# Altium PCB ConBoard20151008.PcbDoc
Units mil, origin at the board's own origin, x right, y up, seen from the top; angles counter-clockwise.
Board outline 6000 x 4000 mil, 2 copper layers (Top Layer, Bottom Layer); 12 components, 31 nets, 61 pads, 27 vias.
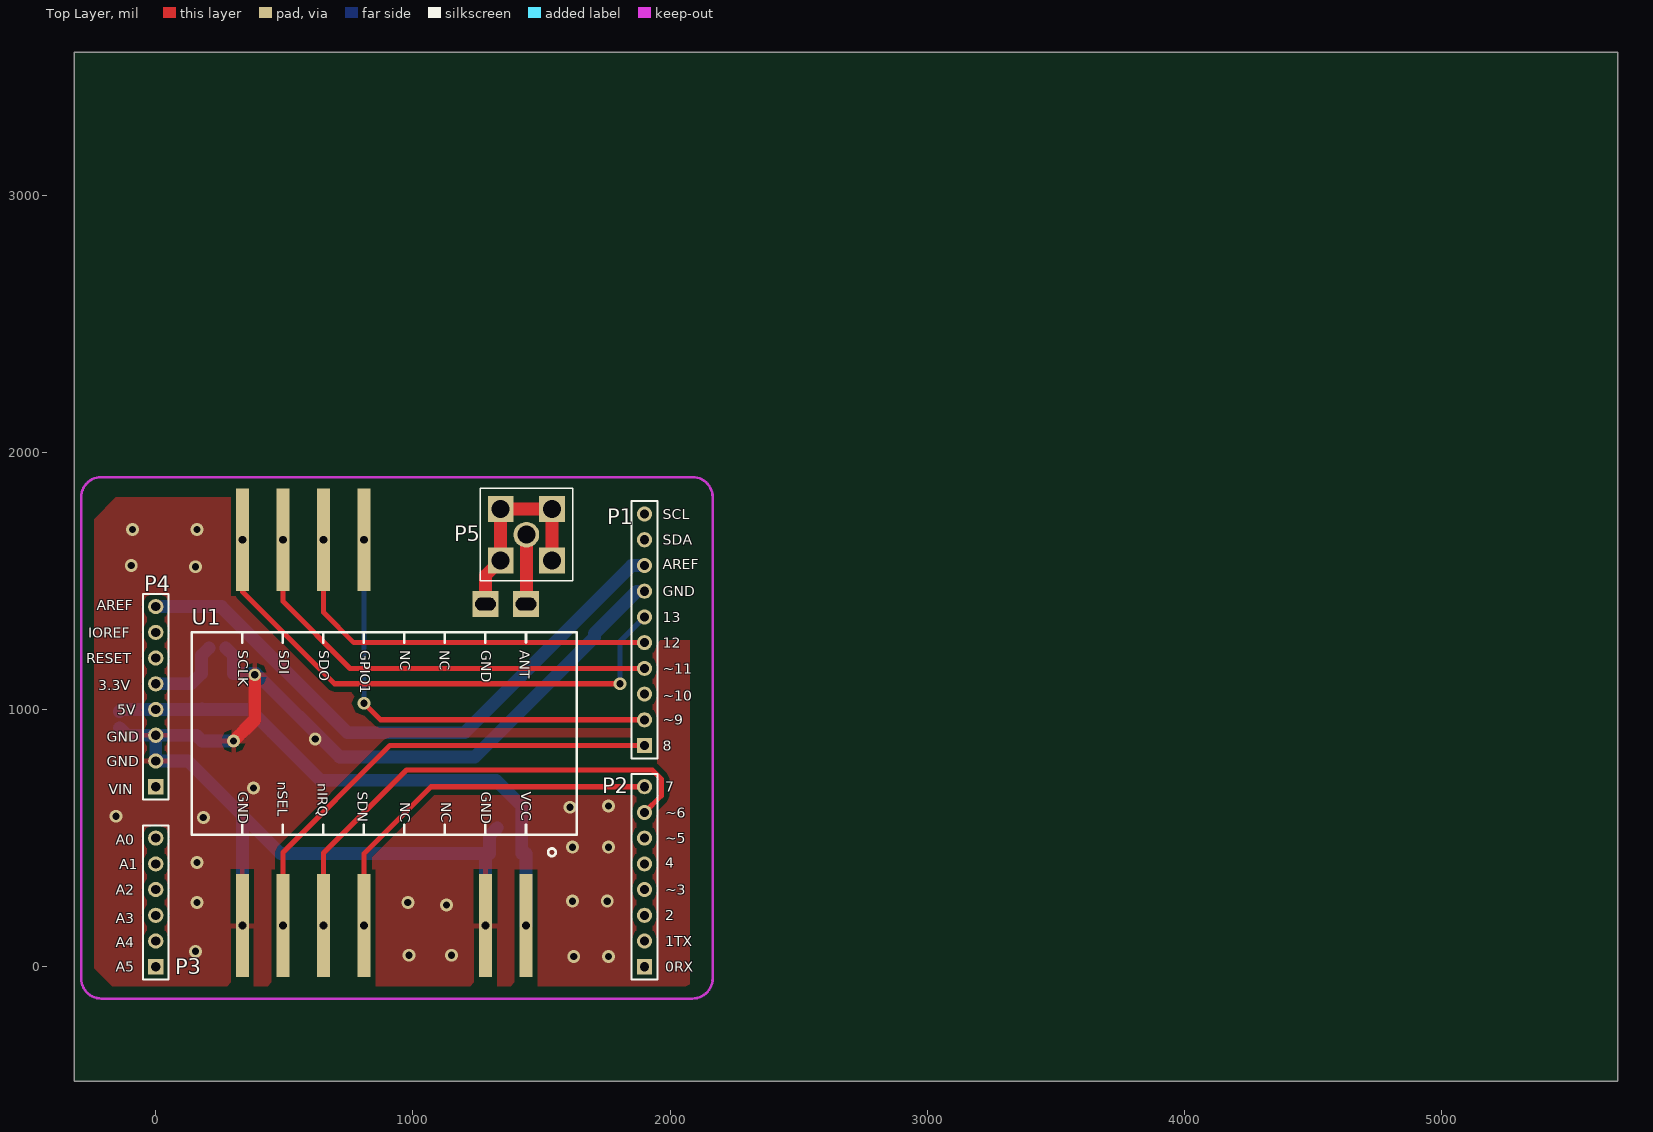
[diagram p0: Top Layer view]
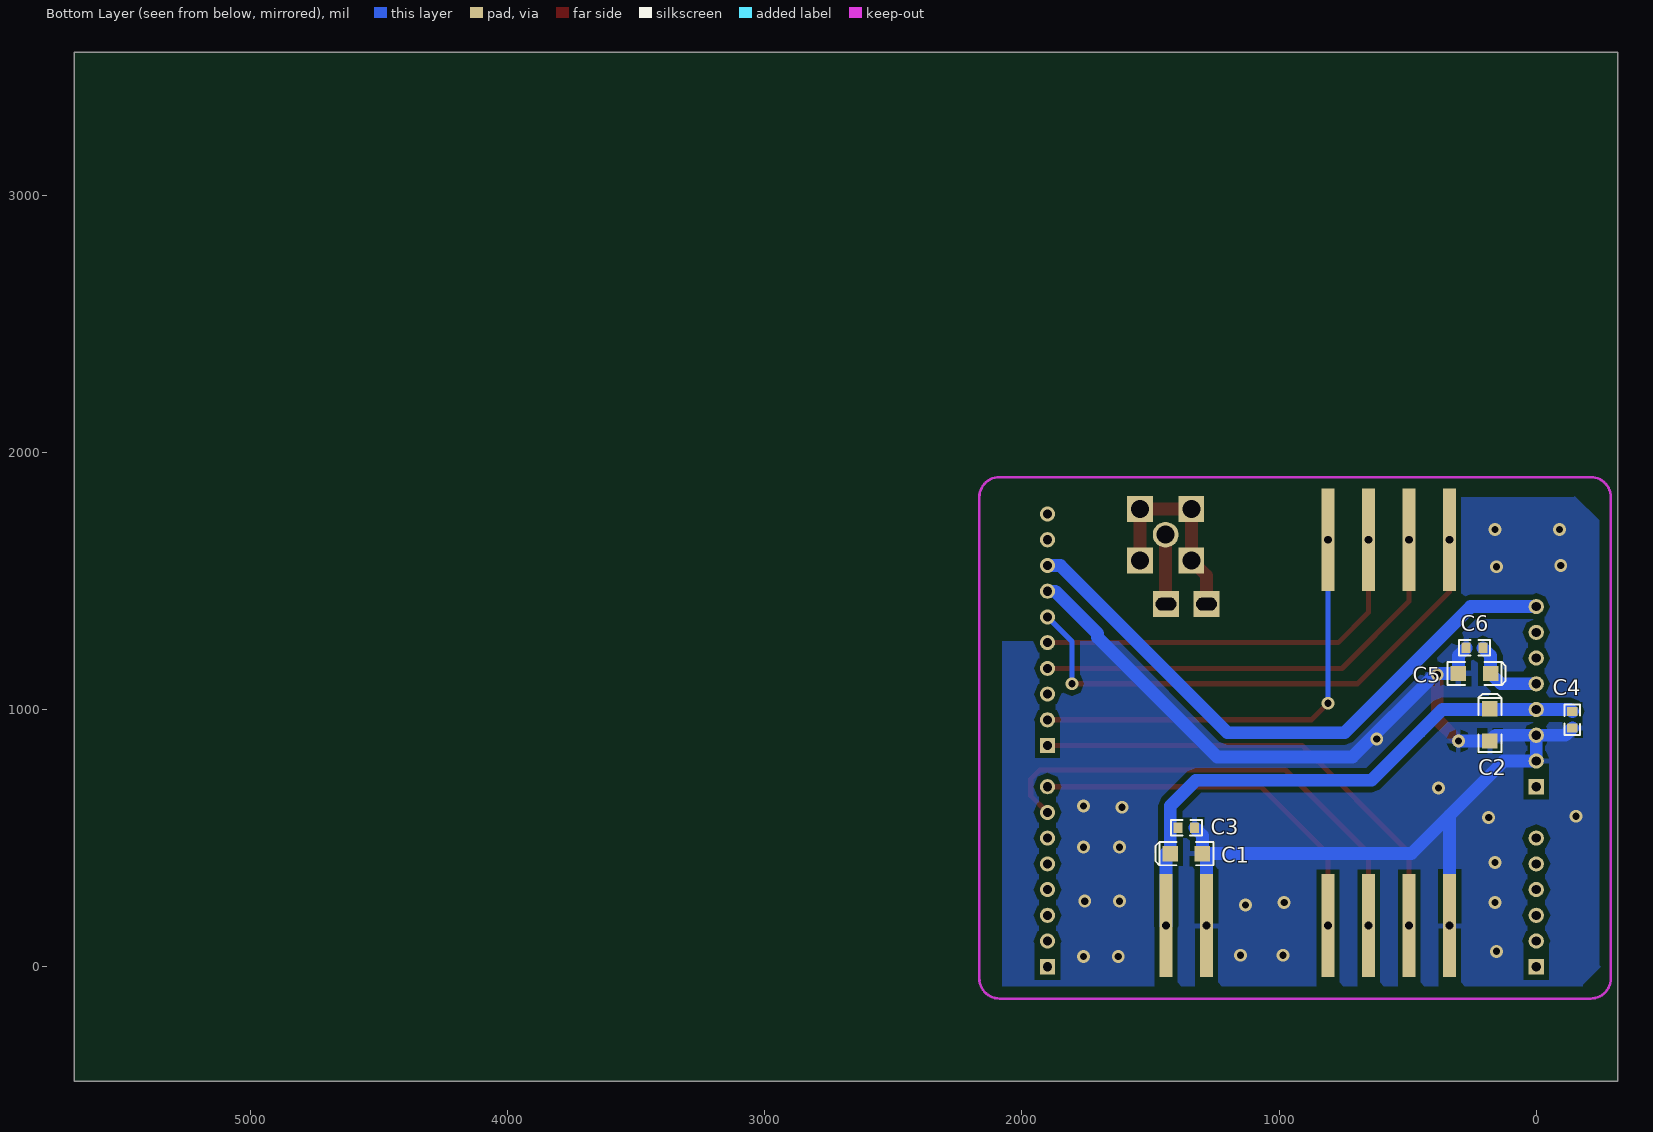
[diagram p1: Bottom Layer view, seen from below]

## Layer stack, top to bottom
Top Layer: signal copper 1.4
Dielectric: dielectric 12.6, FR-4, Dk 4.8
Bottom Layer: signal copper 1.4

## Board outline
-316.67,-445 5683.33,-445 5683.33,3555 -316.67,3555

## Design rules (kind name [scope] priority, off if disabled: settings)
Clearance [All] p1: gap=20
PolygonConnect [All] p1: connectstyle=Relief reliefconductorwidth=20 reliefentries=4 polygonreliefangle="90 Angle"
RoomDefinition Sheet1 [InComponentClass('Sheet1')] p1 off: confinementstyle=ConfineIn formatcopy=TRUE lockcomponents=FALSE outline 5728.33,-485 7543.33,-485 7543.33,635 5728.33,635
RoutingVias [All] p1: holewidth=28 width=50 viastyle="Through Hole" minholewidth=28 minwidth=50 maxholewidth=28 maxwidth=50
SilkToSilkClearance [All] p1 off: silktosilkclearance=10
SilkscreenOverComponentPads [All] p1 off: minsilkscreentomaskgap=10
SolderMaskExpansion [All] p1: expansion=4
Width [All] p1: maxlimit=100 minlimit=10 preferedwidth=10
26 further rules are at their usual default settings.

## Components (designator, comment, footprint, x,y, rotation, side; value= is the part's Value field where it differs from the comment)
C1 "47u" 3216C 1360,440 r180 bottom
C2 "47u" 3216C 180,940 r270 bottom
C3 "0.1uF" 0603 1360,540 r180 bottom
C4 "0.1uF" 0603 -140,960 r270 bottom
C5 "47u" 3216C 240,1140 r0 bottom
C6 "0.1uF" 0603 240,1240 r0 bottom
P1 "Header 10" HDR1X10 1900,860 r90 top
P2 "Header 8" HDR1X8 1900,0 r90 top
P3 "Header 6" HDR1X6 0,0 r90 top
P4 "Header 8" HDR1X8 0,700 r90 top
P5 "SMA_SMD" SMA 1440,1680 r0 top
U1 "Header 10" RF4463F30 140,1300 r270 top

## Footprints (in the part's own frame and the unit in brackets; to place one, negate y for a bottom-side part, rotate by r counter-clockwise, add the part's x,y. Pads: shape width x height; smd on the part's side, far side on the other; paste and mask are expansions set on the pad)
0603 [mil]
  rect 35x40 smd: 1(-32.66,0.32) 2(32.34,0.32)
  silkscreen extent -60,-30 60,30
3216C [mil]
  rect 60x60 smd: 1(-62.62,0) 2(62.38,0)
  silkscreen extent -120,-45 105,45
HDR1X6 [mm] "Connector; Header; 6 Position"
  rect 1.5x1.5 hole 0.9: 1(0,0)
  round 1.5 hole 0.9: 2(2.54,0) 3(5.08,0) 4(7.62,0) 5(10.16,0) 6(12.7,0)
  silkscreen extent -1.27,-1.27 13.97,1.27
HDR1X8 [mm] "Connector; Header; 8 Position"
  rect 1.5x1.5 hole 0.9: 1(0,0)
  round 1.5 hole 0.9: 2(2.54,0) 3(5.08,0) 4(7.62,0) 5(10.16,0) 6(12.7,0) 7(15.24,0) 8(17.78,0)
  silkscreen extent -1.27,-1.27 19.05,1.27
HDR1X10 [mm] "Connector; Header; 10 Position"
  rect 1.5x1.5 hole 0.9: 1(0,0)
  round 1.5 hole 0.9: 2(2.54,0) 3(5.08,0) 4(7.62,0) 5(10.16,0) 6(12.7,0) 7(15.24,0) 8(17.78,0) 9(20.32,0) 10(22.86,0)
  silkscreen extent -1.27,-1.27 24.13,1.27
RF4463F30 [mil]
  rect 400x50 hole 30: 1(1140,1299.21) 2(1140,1141.73) 5(1140,669.29) 6(1140,511.81) 7(1140,354.33) 8(1140,196.85) 9(-360,196.85) 10(-360,354.33) 11(-360,511.81) 12(-360,669.29)
  rect 100x100 hole 50 slot 80 at 90 deg: 15(-110,1141.73) 16(-110,1299.21)
  silkscreen extent 0,0 870,1496
SMA [mil]
  round 100 hole 70: 1(0.73,-0.32)
  rect 100x100 hole 70: 2(100.73,99.68) 3(-99.27,99.68) 4(-99.27,-100.32) 5(100.73,-100.32)
  silkscreen extent -179,-180 181,180

## Part data
C1 C2 C5: library part "CAPACITOR POL", "Capacitor"
C3 C4 C6: library part CAP, "Capacitor"
P1: "Header, 10-Pin"
P2 P4: "Header, 8-Pin"
P3: "Header, 6-Pin"
U1: library part RF4463F30, "Header, 10-Pin"

## Via types
v1: diameter 50, hole 28, Top Layer to Bottom Layer, 27 vias

## Nets (pads, with @x,y where several pads share a name; then routed paths per layer and width w, separated by ;. In a path a pad name is that pad's centre, name@x,y a point inside that pad or via, vN(x,y) a via of type N, cw(c..) or ccw(c..) an arc to the next point about the centre after c; other vN are vias at no path point)
0RX: P2.1
1TX: P2.2
2: P2.3
3.3V: C5.1 C6.1 P4.5 | length 306
  Bottom Layer w50: P4.5 137.38,1100 C5.1 177.38,1209.72 C6.1
4: P2.5
5V: C1.1 C2.1 C3.1 C4.1 P4.4 U1.1 | length 2190
  Bottom Layer w50: C4.1 -132.98,1000 P4.4 C2.1@177.38,1000 ; C2.1 C2.1@177.38,1000 ; C1.1 1422.62,540 1422.62,540.32 1422.62,625 1322.62,725 640,725 452.5,912.5 365,1000 C2.1@177.38,1000 ; U1.1 C1.1@1439.21,440
7: P2.8 U1.5 | length 1478
  Top Layer w20: U1.5 809.29,439.29 1070,700 P2.8
8: P1.1 U1.7 | length 1862.2
  Top Layer w20: U1.7 494.33,444.33 910,860 P1.1
12: P1.5 U1.11 | length 1579
  Top Layer w20: U1.11 651.81,1378.19 770,1260 P1.5
13: P1.6 U1.9 | length 2117.7
  Top Layer w20: U1.9 336.85,1458.15 695,1100 v1(1805,1100)
  Bottom Layer w20: v1(1805,1100) 1805,1265 P1.6
A0: P3.6
A1: P3.5
A2: P3.4
A3: P3.3
A4: P3.2
A5: P3.1
AGND: P5.2 P5.3 P5.4 P5.5 U1.15 | length 794.1
  Top Layer w50: U1.15 1281.73,1520.68 P5.4 P5.3 P5.2 P5.5
ANT: P5.1 U1.16 | length 270.3
  Top Layer w50: U1.16 1440.73,1411.52 P5.1
AREF: P1.8 P4.8 | length 2372.2
  Bottom Layer w50: P4.8 255,1400 745,910 1200,910 1850,1560 P1.8
GND: C1.2 C2.2 C3.2 C4.2 C5.2 C6.2 P1.7 P4.2 P4.3 U1.2 U1.8 | length 5249.7
  Top Layer w50: v1(302.62,877.61) 385,960 v1(385,1135)
  Bottom Layer w50: C4.2 -112.66,900 P4.3 ; C6.2 302.38,1209.64 C5.2 390,1140 715,815 1240,815 1705,1280 1705,1295 1870,1460 P1.7 ; v1(302.62,877.61) C2.2 157.62,900 P4.3 ; U1.8 336.85,588.15 ; U1.2 1281.73,424.12 C1.2 ; C3.2 1297.62,510.28 C1.2 ; P4.3 P4.2 125,800 336.85,588.15 ; 336.85,588.15 485,440 C1.2
  other v1: 1625,40 1760,40 985,45 1150,45 155,60 1130,240 160,250 980,250 1620,255 1755,255 160,405 1620,465 1760,465 185,580 -155,585 1610,620 1760,625 380,695 620,885 155,1555 -95,1560 -90,1700 160,1700
IOREF: P4.7
RESET: P4.6
SCL: P1.10
SDA: P1.9
VIN: P4.1
~3: P2.4
~5: P2.6
~6: P2.7 U1.6 | length 1900.3
  Top Layer w20: U1.6 651.81,441.81 975,765 1930,765 1965,730 1965,665 P2.7
~9: P1.2 U1.12 | length 1753
  Top Layer w20: v1(809.29,1024.29) 873.58,960 P1.2
  Bottom Layer w20: v1(809.29,1024.29) U1.12
~10: P1.3
~11: P1.4 U1.10 | length 1753
  Top Layer w20: U1.10 494.33,1420.67 755,1160 P1.4

## Polygon pours and split planes (outlines as drawn)
GND on Top Layer "Bottom Layer-No Net" (solid, remove dead copper, pour order 1000): -155,1825 900,1825 900,1295 875,1270 2075,1270 2075,-90 2060,-75 -50,-75 -170,-75 -230,-15 -240,-5 -240,1715 -240,1740 -155,1825
GND on Bottom Layer "Bottom Layer-No Net" (solid, remove dead copper, pour order 1001): -150,1830 -145,1825 900,1825 900,1260 915,1245 935,1265 2075,1265 2075,-75 -180,-75 -180,-70 -250,0 -245,5 -245,1735 -150,1830

## Keep-outs
Keep-Out Layer:
  lines w10: -290,-45 ccw(c-211.26,-45) -211.26,-123.74 2086.26,-123.74 ccw(c2086.26,-45) 2165,-45 2165,1825 ccw(c2086.26,1825) 2086.26,1903.74 -211.26,1903.74 ccw(c-211.26,1825) -290,1825 -290,-45

## Silkscreen, mask and mechanical layers (free items; w line width, h text height)
Top Overlay:
  text "SCL" at 1970,1740 h40
  text "SDA" at 1970,1640 h40
  text "AREF" at 1970,1545 h40
  text "GND" at 1970,1440 h40
  text "AREF" at -230.01,1385 h40
  text "13" at 1970,1340 h40
  text "IOREF" at -263.34,1280 h40
  text "12" at 1970,1240 h40
  text "RESET" at -270,1180 h40
  text "~11" at 1970,1140 h40
  text "3.3V" at -223.35,1075 h40
  text "~10" at 1970,1035 h40
  text "5V" at -150.04,980 h40
  text "~9" at 1970,940 h40
  text "GND" at -190.03,875 h40
  text "8" at 1970,840 h40
  text "GND" at -190.03,780 h40
  text "7" at 1980,680 h40
  text "VIN" at -183.36,670 h40
  text "~6" at 1980,580 h40
  text "~5" at 1980,480 h40
  text "A0" at -155,475 h40
  text "4" at 1980,385 h40
  text "A1" at -141.67,380 h40
  text "A2" at -155,280 h40
  text "~3" at 1980,280 h40
  text "2" at 1980,180 h40
  text "A3" at -155,170 h40
  text "1TX" at 1980,80 h40
  text "A4" at -155,75 h40
  text "A5" at -155,-20 h40
  text "0RX" at 1980,-20 h40

## Text inside footprints (layer, text, board x,y; h text height)
U1: Top Overlay "VCC" at 1420,680.01 h40 r270; Top Overlay "GND" at 1265,680.01 h40 r270; Top Overlay "NC" at 1110,640.03 h40 r270; Top Overlay "NC" at 950,640.03 h40 r270; Top Overlay "NC" at 1105,1230 h40 r270; Top Overlay "NC" at 950,1230 h40 r270; Top Overlay "SDN" at 785,680.01 h40 r270; Top Overlay "nIRQ" at 630,713.34 h40 r270; Top Overlay "nSEL" at 475,720 h40 r270; Top Overlay "GND" at 320,680.01 h40 r270; Top Overlay "GND" at 1265,1230 h40 r270; Top Overlay "ANT" at 1415,1230 h40 r270; Top Overlay "GPIO1" at 795,1230 h40 r270; Top Overlay "SDO" at 635,1230 h40 r270; Top Overlay "SDI" at 480,1230 h40 r270; Top Overlay "SCLK" at 320,1230 h40 r270